# Altium PCB PCB1.PcbDoc
Units mm, origin at the board's own origin, x right, y up, seen from the top; angles counter-clockwise.
Board outline 61.6 x 33.9 mm, 2 copper layers (Top Layer, Bottom Layer); 45 components, 33 nets, 126 pads, 27 vias.
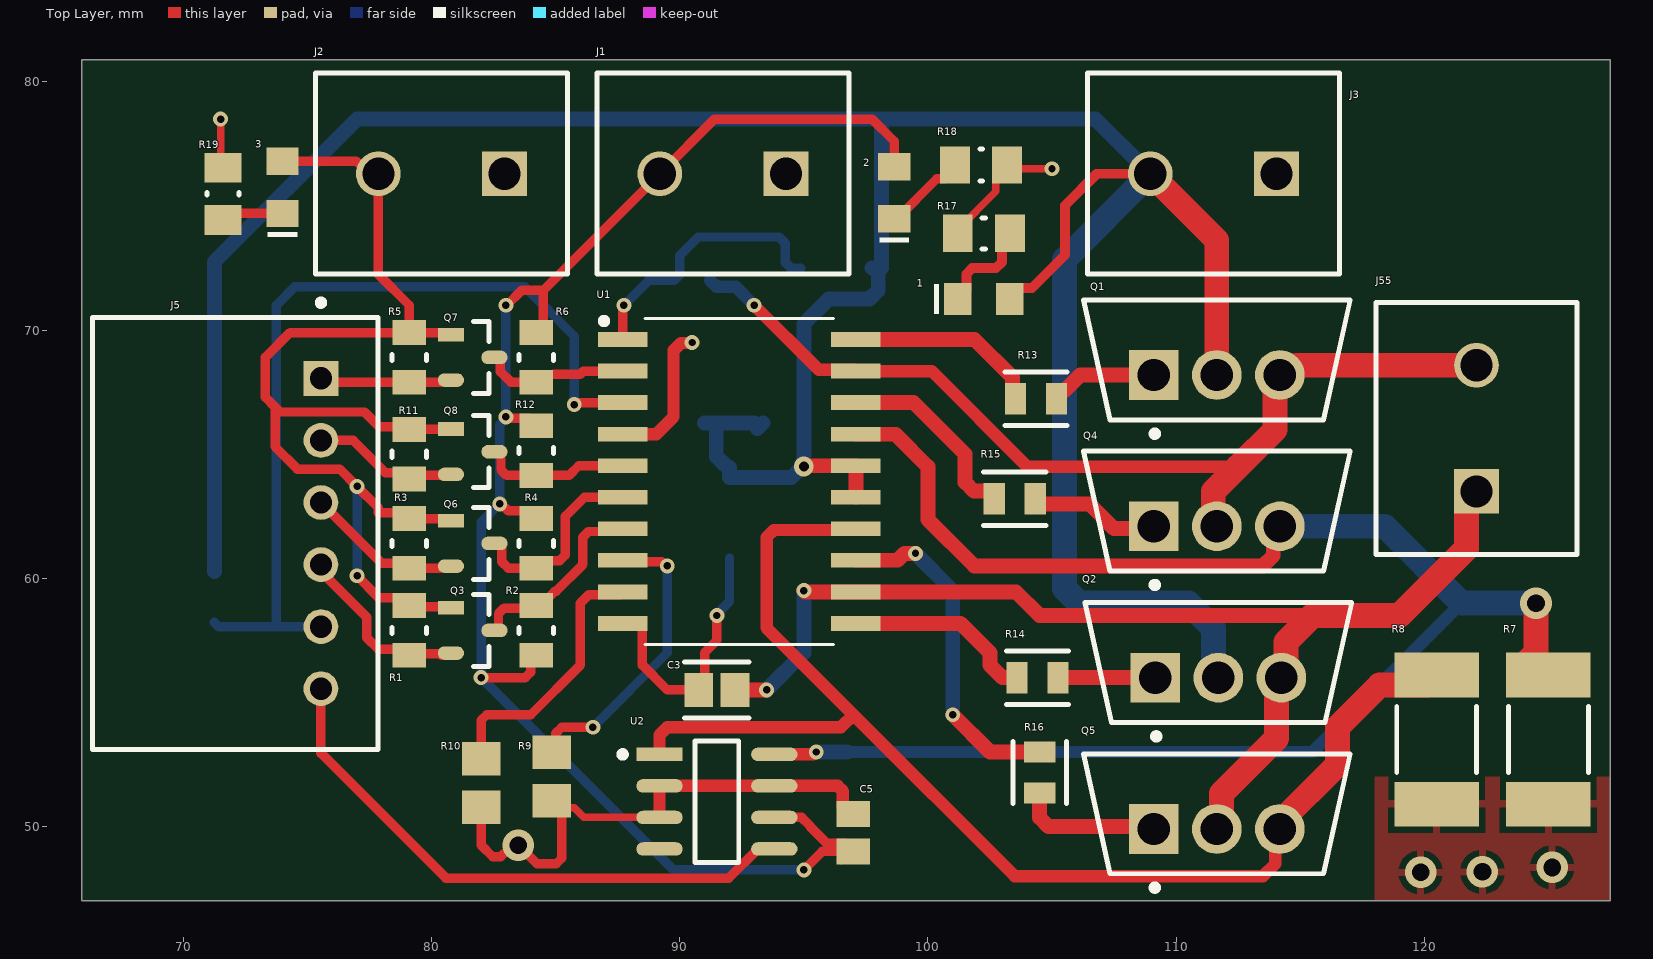
[diagram p0: Top Layer view]
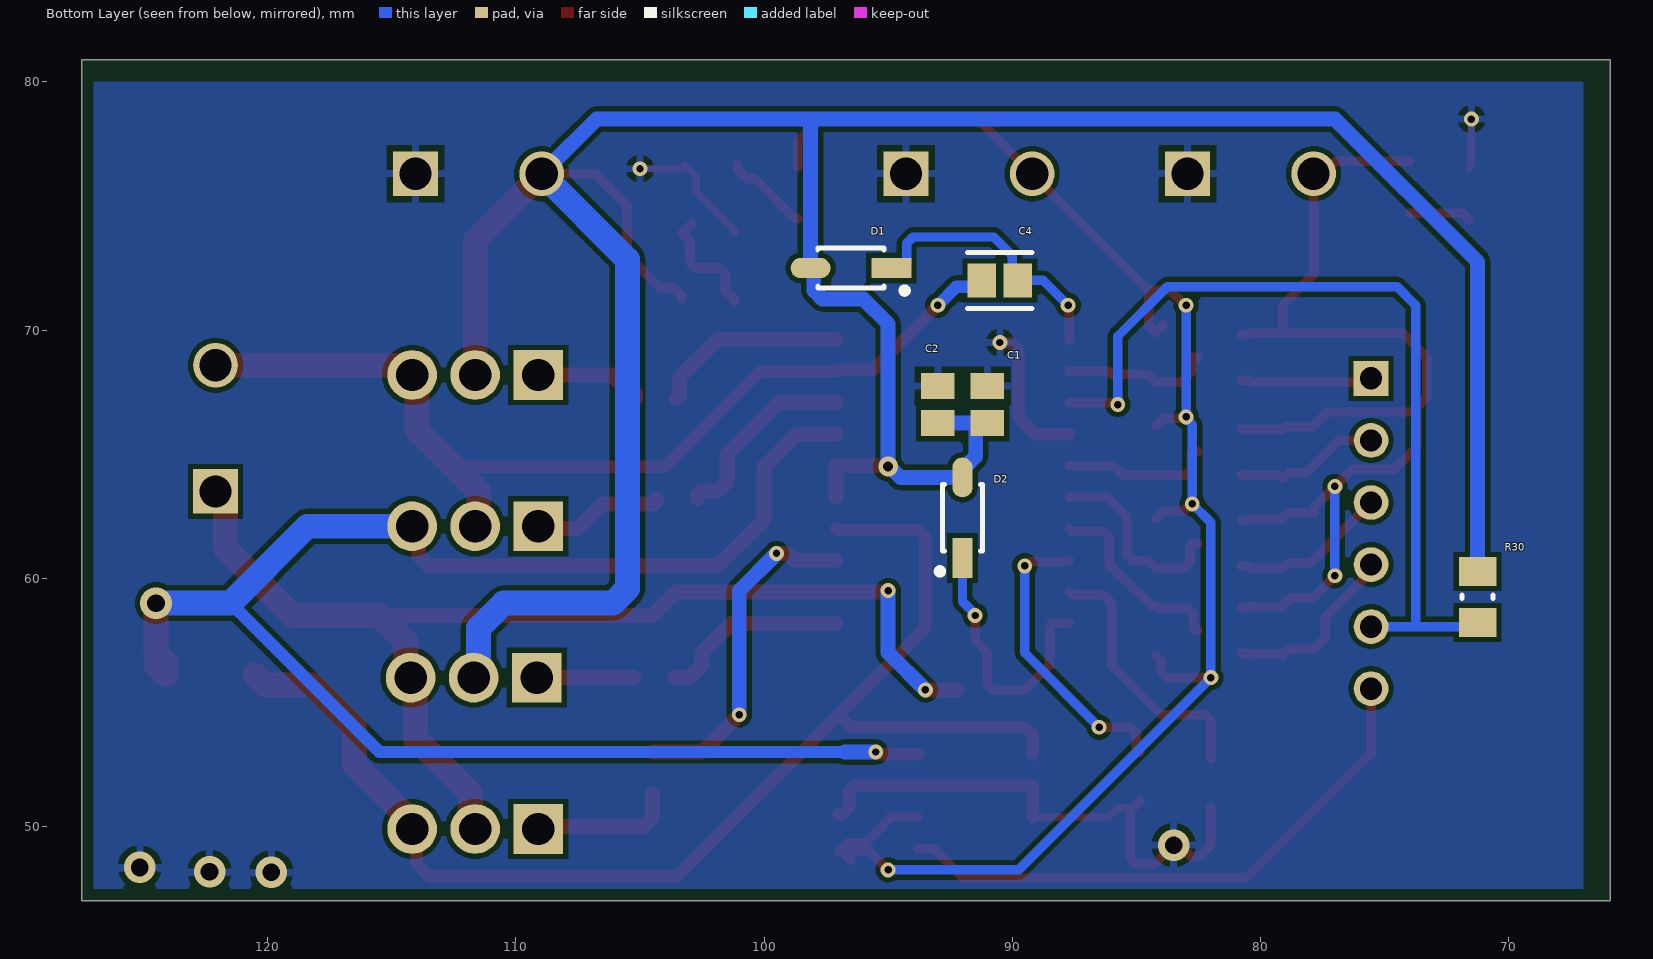
[diagram p1: Bottom Layer view, seen from below]
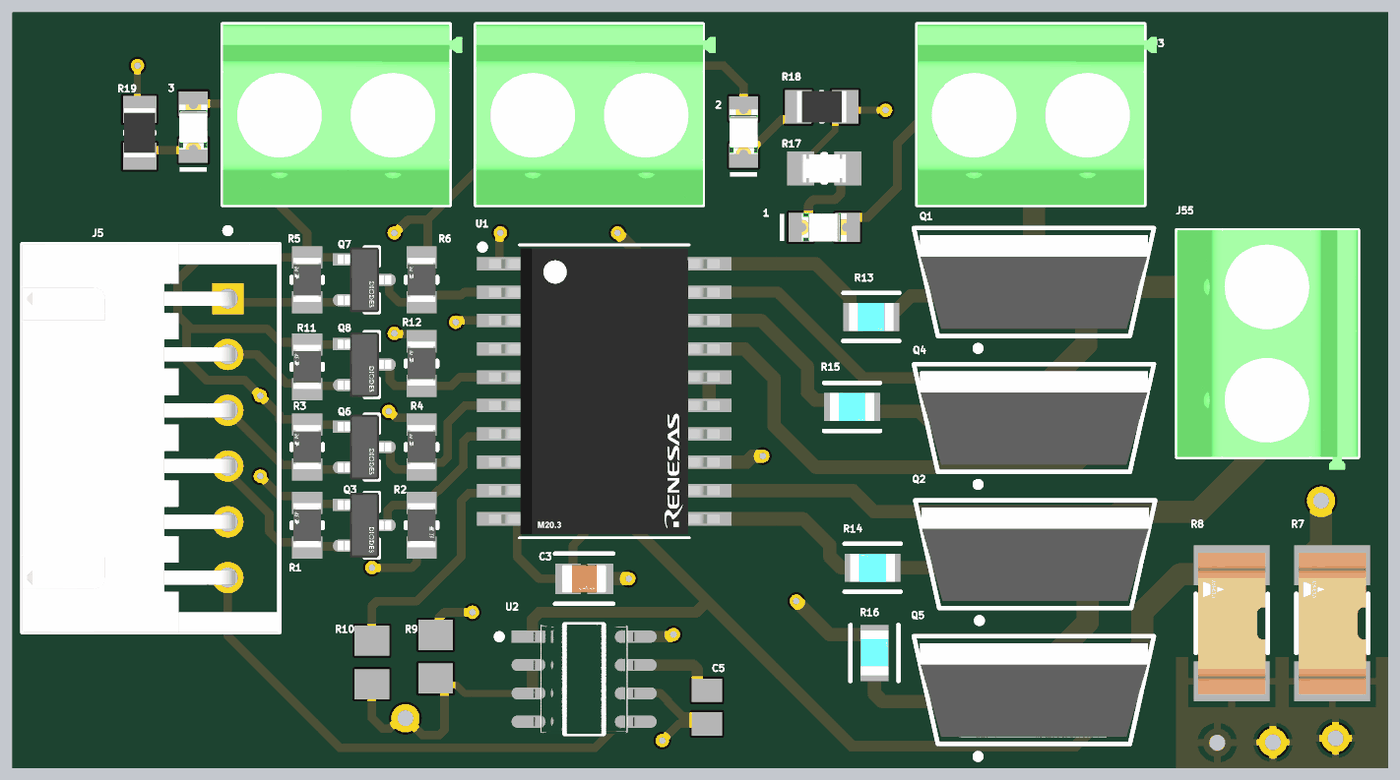
[diagram p2: 3D render of the assembled board from above, using the file's embedded part models]
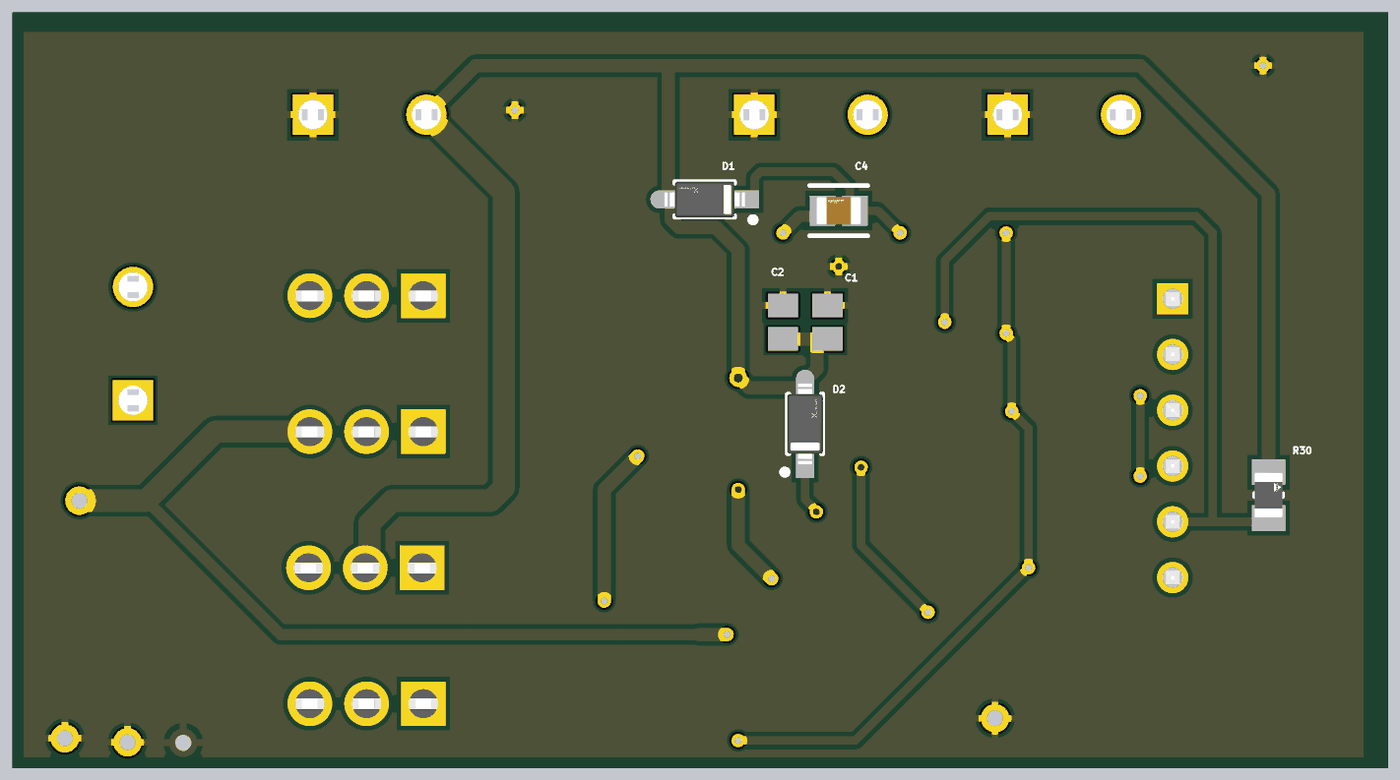
[diagram p3: 3D render of the assembled board from below, using the file's embedded part models]

## Layer stack, top to bottom
Top Solder: solder mask 0.0102, Solder Resist, Dk 3.5
Top Layer: signal copper 0.0356
Dielectric 1: dielectric 0.32, FR-4, Dk 4.8
Bottom Layer: signal copper 0.0356
Bottom Solder: solder mask 0.0102, Solder Resist, Dk 3.5

## Board outline
65.9,47 65.9,80.9 127.5,80.9 127.5,47

## Design rules (kind name [scope] priority, off if disabled: settings)
Clearance [All] p1: gap=0.2 ignorepadtopadclearanceinfootprint=FALSE
MinimumSolderMaskSliver [All] p1: minsoldermaskwidth=0.2
PolygonConnect [All] p1: connectstyle=Relief reliefconductorwidth=0.3 reliefentries=4 polygonreliefangle="90 Angle" airgapwidth=0.254
RoutingVias [All] p1: holewidth=0.3 width=0.7 viastyle="Through Hole" minholewidth=0.25 minwidth=0.3 maxholewidth=0.4 maxwidth=0.9
SolderMaskExpansion [All] p1: expansion=0.102 istentingtop=FALSE
SupplyNets "Schematic Supply Nets_3" [InNet('3V3')] p1: voltage=0.000
SupplyNets "Schematic Supply Nets_2" [InNet('5V')] p2: voltage=0.000
SupplyNets "Schematic Supply Nets_1" [InNet('GND')] p3: voltage=0.000
SupplyNets "Schematic Supply Nets" [InNet('+12')] p4: voltage=0.000
UnRoutedNet [All] p1: checkbadconnections=TRUE
Width [All] p1: maxlimit=1 minlimit=0.2 preferedwidth=0.3 minimp=50.000000 maximp=50.000000 favimp=50.000000
28 further rules are at their usual default settings.

## Components (designator, comment, footprint, x,y, rotation, side; value= is the part's Value field where it differs from the comment)
1 "RED LED" WL-SMCW_0805_150080xx75000 102.25,71.25 r0 top
2 "RED LED" WL-SMCW_0805_150080xx75000 98.644,75.531 r90 top
3 "RED LED" WL-SMCW_0805_150080xx75000 74,75.75 r90 top
C1 "100n" CAPC2013X140X45LL15T25 91,67 r270 bottom
C2 "100nF" CAPC2013X140X45LL15T25 93,67 r270 bottom
C3 "0.033uF" FP-GCG21B-0_3-IPC_C 91.5,55.5 r0 top
C4 "0.033uF" FP-GCG21B-0_3-IPC_C 90.5,72 r0 bottom
C5 "100nF" CAPC2013X140X45LL15T25 97,49.75 r270 top
D1 "BAT46GWJ" FP-SOD123-IPC_A 96.5,72.5 r0 bottom
D2 "BAT46GWJ" FP-SOD123-IPC_A 92.007,62.44 r90 bottom
J1 "1729128" PHOE-1729128-2_V 91.74,76.3 r180 top
J2 "1729128" PHOE-1729128-2_V 80.4,76.3 r180 top
J3 "1729128" PHOE-1729128-2_V 111.502,76.3 r180 top
J5 "S6B-XH-A (LF)(SN)" FP-S6B-XH-A_LF_SN-MFG 72.096,61.804 r90 top
J55 "1729128" PHOE-1729128-2_V 122.1,66.04 r90 top
Q1 "IRF520NPBF" FP-PG-TO220-3-MFG 111.64,68.8 r90 top
Q2 "IRF520NPBF" FP-PG-TO220-3-MFG 111.7,56.604 r90 top
Q3 "BS170FTA" FP-SOT23-IPC_C 81.66,57.9 r0 top
Q4 "IRF520NPBF" FP-PG-TO220-3-MFG 111.64,62.706 r90 top
Q5 "IRF520NPBF" FP-PG-TO220-3-MFG 111.64,50.51 r90 top
Q6 "BS170FTA" FP-SOT23-IPC_C 81.66,61.404 r0 top
Q7 "BS170FTA" FP-SOT23-IPC_C 81.66,68.9 r0 top
Q8 "BS170FTA" FP-SOT23-IPC_C 81.66,65.099 r0 top
R1 "10k" FP-RN732A-MFG 79.1,57.9 r90 top value=10.LKΩ
R2 "10k" FP-RN732A-MFG 84.22,57.9 r270 top value=10.LKΩ
R3 "10k" FP-RN732A-MFG 79.1,61.404 r90 top value=10.LKΩ
R4 "10k" FP-RN732A-MFG 84.22,61.404 r90 top value=10.LKΩ
R5 "10k" FP-RN732A-MFG 79.1,68.9 r90 top value=10.LKΩ
R6 "10k" FP-RN732A-MFG 84.22,68.9 r90 top value=10.LKΩ
R7 "2.3m" FP-WSLF2512-1_02-MFG 125,53.5 r90 top
R8 "2.3m" FP-WSLF2512-1_02-MFG 120.5,53.5 r90 top
R9 "200k" RESC2013X70X40ML20T20 84.854,52.01 r90 top
R10 "200k" RESC2013X70X40ML20T20 82,51.75 r90 top
R11 "10k" FP-RN732A-MFG 79.1,65 r90 top value=10.LKΩ
R12 "10k" FP-RN732A-MFG 84.22,65.146 r90 top value=10.LKΩ
R13 "27" FP-RK73H2A-IPC_C 104.358,67.236 r0 top
R14 "27" FP-RK73H2A-IPC_C 104.418,55.997 r180 top
R15 "27" FP-RK73H2A-IPC_C 103.5,63.203 r0 top
R16 "27" FP-RK73H2A-IPC_C 104.5,52.175 r90 top
R17 "47k" FP-CRCW0805-e3-IPC_A 102.254,73.896 r180 top
R18 "Resistor 10k +/-1% 0805 125 mW" RESC2013X50X35ML15T15 102.142,76.654 r0 top value=10k
R19 "Resistor 10k +/-1% 0805 125 mW" RESC2013X50X35ML15T15 71.596,75.489 r90 top value=10k
R30 "20k" FP-MCU0805-IPC_A 71.25,59.25 r90 bottom
U1 "HIP4081AIBZ" M20_3_MFG 92.4,63.9 r0 top
U2 "INA240A4EDRQ1" FP-D0008A-IPC_C 91.5,51 r0 top

## Footprints (in the part's own frame and the unit in brackets; to place one, negate y for a bottom-side part, rotate by r counter-clockwise, add the part's x,y. Pads: shape width x height; smd on the part's side, far side on the other; paste and mask are expansions set on the pad)
CAPC2013X140X45LL15T25 [mm] "Chip Capacitor, 2-Leads, Body 2.00x1.25mm, IPC High Density"
  rect 1.05x1.35 smd: 1(-0.75,0) 2(0.75,0)
  body extent -1.08,-0.7 1.07,0.7, height 1.4
FP-CRCW0805-e3-IPC_A [mil]
  rect 47.5x59.38 smd paste+0 mask+0: 1(-41.37,0) 2(41.37,0)
  silkscreen extent -3,-25 3,25, body extent -85,-49 85,49, height 10
FP-D0008A-IPC_C [mm]
  rect 1.869x0.542 smd paste+0 mask+0: 1(-2.314,1.905)
  rrect100% 1.869x0.542 smd paste+0 mask+0: 2(-2.314,0.635) 3(-2.314,-0.635) 4(-2.314,-1.905) 5(2.314,-1.905) 6(2.314,-0.635) 7(2.314,0.635) 8(2.314,1.905)
  silkscreen extent -3.92,-2.45 0.88,2.45, body extent -3.35,-2.55 3.35,2.55, height 0.25
FP-GCG21B-0_3-IPC_C [mm]
  rect 1.153x1.356 smd paste+0 mask+0: 1(-0.725,0) 2(0.725,0)
  silkscreen extent -1.3,-1.12 1.3,1.12, body extent -1.4,-0.82 1.4,0.82, height 0.25
FP-MCU0805-IPC_A [mm]
  rect 1.159x1.508 smd paste+0 mask+0: 1(-1.027,0) 2(1.027,0)
  silkscreen extent -0.07,-0.63 0.07,0.63, body extent -1,-0.63 1,0.63, height 0.55
FP-PG-TO220-3-MFG [mm]
  rect 2x2 hole 1.3 paste-2539.97 mask+0: 1(-0.61,2.54)
  round 2 hole 1.3 paste-2539.97 mask+0: 2(-0.61,0) 3(-0.61,-2.54)
  silkscreen extent -3.1,-5.38 2.41,5.38, body extent -2.51,-5.48 2.51,5.48, height 0.25
FP-RK73H2A-IPC_C [mil]
  rect 33.67x49.69 smd paste+0 mask+0: 1(-32.5,0) 2(32.5,0)
  silkscreen extent -49,-42 49,42, body extent -53,-31 53,31, height 10
FP-RN732A-MFG [mm]
  rect 1x1.35 smd paste+0 mask+0: 1(-1,0) 2(1,0)
  silkscreen extent -0.13,-0.7 0.13,0.7, body extent -1.6,-0.8 1.6,0.8, height 0.25
FP-S6B-XH-A_LF_SN-MFG [mm]
  rect 1.4x1.4 hole 0.9 paste-2539.97 mask+0: 1(6.25,-3.45)
  round 1.4 hole 0.9 paste-2539.97 mask+0: 2(3.75,-3.45) 3(1.25,-3.45) 4(-1.25,-3.45) 5(-3.75,-3.45) 6(-6.25,-3.45)
  silkscreen extent -8.7,-5.75 9.42,5.75, body extent -8.7,-5.75 8.7,5.75, height 6.1
FP-SOD123-IPC_A [mm]
  rect 1.607x0.816 smd paste+0 mask+0: 1(-1.626,0)
  rrect100% 1.607x0.816 smd paste+0 mask+0: 2(1.626,0)
  silkscreen extent -2.29,-0.8 1.34,1.03, body extent -1.8,-0.8 1.8,0.8, height 1.3
FP-SOT23-IPC_C [mm]
  rect 1.059x0.547 smd paste+0 mask+0: 1(-0.877,0.915)
  rrect100% 1.059x0.547 smd paste+0 mask+0: 2(-0.877,-0.915) 3(0.877,0)
  silkscreen extent 0.03,-1.45 0.65,1.45, body extent -1.51,-1.55 1.51,1.55, height 0.25
FP-WSLF2512-1_02-MFG [mm]
  rect 1.8x3.4 smd paste+0 mask+0: 1(-2.6,0) 2(2.6,0)
  silkscreen extent -1.33,-1.61 1.33,1.61, body extent -3.6,-1.8 3.6,1.8, height 0.25
M20_3_MFG [mm] "Recommended Land Pattern"
  rect 2x0.6 smd paste+0 mask+0: 1(-4.7,5.715) 2(-4.7,4.445) 3(-4.7,3.175) 4(-4.7,1.905) 5(-4.7,0.635) 6(-4.7,-0.635) 7(-4.7,-1.905) 8(-4.7,-3.175) 9(-4.7,-4.445) 10(-4.7,-5.715) 11(4.7,-5.715) 12(4.7,-4.445) 13(4.7,-3.175) 14(4.7,-1.905) 15(4.7,-0.635) 16(4.7,0.635) 17(4.7,1.905) 18(4.7,3.175) 19(4.7,4.445) 20(4.7,5.715)
  silkscreen extent -5.57,-6.56 3.8,6.59, body extent -5.16,-6.4 5.16,6.4, height 2.65
PHOE-1729128-2_V [mm] "Receptacle, 2-Leads, Body 8.1x10.16mm, Pitch 5.08mm"
  rect 1.8x1.8 hole 1.3: 1(-2.54,0)
  round 1.8 hole 1.3: 2(2.54,0)
  silkscreen extent -5.08,-4.05 5.08,4.05, body extent -5.65,-4.05 5.08,4.05, height 10.01
RESC2013X50X35ML15T15 [mm] "Chip Resistor, 2-Leads, Body 2.2x1.4mm, IPC Low Density"
  rect 1.2x1.5 smd: 1(-1.05,0) 2(1.05,0)
  silkscreen extent -0.05,-0.65 0.05,0.65, body extent -1.1,-0.7 1.1,0.7, height 0.5
RESC2013X70X40ML20T20 [mm] "Chip Resistor, 2-Leads, Body 2.00x1.25mm, IPC Low Density"
  rect 1.35x1.55 smd: 1(-0.975,0) 2(0.975,0)
  body extent -1.1,-0.72 1.1,0.72, height 0.7
WL-SMCW_0805_150080xx75000 [mm] "SMD Mono-color Chip LED, body 2.0x1.25mm"
  rect 1.1x1.3 smd: 1(-1.05,0) 2(1.05,0)
  silkscreen extent -2,-0.6 -1.8,0.6, body extent -1,-0.63 1,0.62, height 0.7

## Part data
1 2 3: library part CMP-1426-00010-3, Case Code (Imperial)=0805, Case Code (Metric)=2012, Color=Red, Forward Current=100mA, Forward Voltage=1.9V, Max Junction Temperature (Tj)=95°C, Max Operating Temperature=85°C, Max Reverse Voltage (DC)=5V, Min Operating Temperature=-40°C, Power Dissipation=72mW, Test Current=20mA, Case/Package=0805, Dominant Wavelength=630nm, Height=700µm, Length=2mm, Lens Style="Clear, Rectangular", Luminous Intensity=60mcd, Mount="Surface Mount", NexarPartId=29717782, Packaging="Tape and Reel", Peak Wavelength=645nm, REACH SVHC=Unknown, Reverse Voltage=5V, RoHS=Compliant, Viewing Angle=140°, Wavelength=630nm, Width=1.25mm
C1 C2 C5: library part CMP-2007-03344-1, Manufacturer=Murata, Part Number=GCM21BR71E104KA37L
C3 C4: library part CMP-06035-035210-1, "AgPd Termination Conductive Glue Mounting Chip Multilayer Ceramic Capacitors for Automotive 0805 Package X8L +15/-40% 50V 33000pF 20%"
D1 D2: library part CMP-14398-000021-1, "DIODE SCHOTTKY 100V 250MA SOD123"
J1 J2 J3 J55: library part CMP-2000-05815-1, "PCB Terminal Block, 13.5 A, 400 V, 2-Pin THD, RoHS, Bulk", Current Rating=13500mA, Manufacturer="Phoenix Contact", Package Description="2-Pin Through Hole Device, Body 8.1 x 10.16 mm, Pitch 5.08 mm", Package Reference=1729128-2, Package Version=03/2015, Voltage Rating=400V, Datasheet URL=https://datasheet.ciiva.com/16046/1729128-16046181.pdf, Datasheet Version=12/2013, Manufacturer URL=http://www.phoenixcontact.com/, Mounting Technology=ThroughHole, No. of Positions=2, No. of Rows=1, Orientation=Horizontal, Package URL=https://www.phoenixcontact.com/online/portal/pi/pxc/product_detail_page/!ut/p/b1/3VdJjqNKFDxLH8AFycySyWY2ozFsEPOMMQaDOX1XedGL_1Vdm5YXJleknhSKeBkvI6EA8ncAo3AYoDhBQGco6KN7VURTdemj9us_IEKEZo_YHiPAEWEFmDGOHMORkqKYCORBZxgL7ZoaZYcbFFUZ3fqxSY6GOuxydWUuHqz1ynmMFygu583Bob0Ewr6Sd_l-5m-kAueHiB0jpRwZwe58wwtkpxtMYd_LmGcDRU02dRNEyWt6Y2ti5pSyJ_reIkzIulrqApdnbT11V5jnCKbYNCvhEM1MCpPByat_X379-iThf08CI5GfOPqfBeS3BRoBOdD55AKVv0iLwCMq-2BrzXWSGRH7pUGD9uwXQjiph3xL0DKQwdGa0JImiIOmBNOestqgwTHSSs2oOep-78apyXQBvNi8ZLaFjvjWvcaUEBu0MC6Wbe-d6mB0FAebo2lUWinqYaZs5DAYzV0RP9yitUjnGJ0iI9xhZkT42OCQNUJJhkgWINNQLP2JFP6OpMg3JCVg70jqHT0lvKOnhHf0lPuOnnLf0VPuWx6_dxwUIvwk5WMkT0kLL1mh61l2yZVSzG3pYV_bqo-mj6uMKwKwdnnW8Jh5RTOJzMOA5c-eJDaZQw4mTMPH02PvS_ZAqNVjVTo2WyYLkwH_KU1mmmG5kjRhDqPXLwwVHvVOjCM60-fpXvTDfMGW1PVFVS1r4e4yVDk4ZdNbkUHvqPqQSeian4UD39fNKmachqdJ1NJbyk8rXT9mXTvPk3oE5meulKGgiruPJek-4I9hTT6G8ZLOyRSm2RRVbThERQad5OS28hdt4YW4vG0stgYYzsWsK4_7y6DZMjJSCqri1kyiZR5vD7pwIrNR7QwPHTcLTI5qT7eRlpHrdGiupYlqQDJ7zy_CND8fWWBoLRXxk1RVcXiBQwbTD4Xi7KL-FuO94t9xaqweXzH, Packing=Bulk, PartNumber=1729128, Pitch=5.08mm, RoHS=TRUE
J5: library part CMP-17439-000165-2, "CONN HEADER R/A 6POS 2.5MM", Color=Natural, Contact Resistance=20mR, Current Rating=3A, Flammability Rating="UL94 V-0", Housing Color=White, Insulation Resistance=1GR, Max Operating Temperature=85°C, Max Voltage Rating (AC)=250V, Min Operating Temperature=-25°C, Package Quantity=500, Connector Type=Header, Contact Finish - Mating=TIN, Contact Material=Brass, Contact Plating=Tin, Contact Shape=Square, Contact Type="Male Pin", Depth=11.5mm, Fastening Type=Detent, Gender=Male, Housing Material=Polyamide, Insulation Color=Natural, Insulation Material=Nylon, Lead Free="Lead Free", Lead Pitch=2.5mm, Length=17.4mm, Max Current Rating=3A, Mount="Through Hole", Number Of Contacts=6, Number of Positions=6, Number of Rows=1, Orientation="Right Angle", Packaging=Bulk, Pitch=2.5mm, REACH SVHC="No SVHC", Series=XH, Termination=Solder, Voltage Rating=250V, Voltage Rating (AC)=250V, Wire/Cable Gauge=22AWG
Q1 Q2 Q4 Q5: library part CMP-32901-000276-1, "MOSFET N-CH 100V 9.7A TO-220AB", Case/Package=TO-220, Continuous Drain Current (ID)=9.7A, Drain to Source Breakdown Voltage=100V, Drain to Source Resistance=200mR, Gate to Source Voltage (Vgs)=20V, Input Capacitance=330pF, Max Operating Temperature=175°C, Max Power Dissipation=48W, Min Operating Temperature=-55°C, Threshold Voltage=4V, Contact Plating=Tin, Drain to Source Voltage (Vdss)=100V, Element Configuration=Single, Halogen Free="Halogen Free", Height=0.6inch, Lead Free="Lead Free", Length=0.414inch, Max Dual Supply Voltage=100V, Mount="Through Hole", Number of Pins=3, Packaging=Rail/Tube, Power Dissipation=48W, Rds On Max=200mR, REACH SVHC="No SVHC", Rise Time=23ns, RoHS Compliant=Yes, Turn-Off Delay Time=32ns, Turn-On Delay Time=4.5ns, Width=0.185inch
Q3 Q6 Q7 Q8: library part CMP-12801-000064-2, "MOSFET N-CH 60V .15MA SOT23-3", Case/Package=SOT-23, Continuous Drain Current (ID)=150mA, Drain to Source Breakdown Voltage=60V, Drain to Source Resistance=5R, Gate to Source Voltage (Vgs)=20V, Input Capacitance=60pF, Max Operating Temperature=150°C, Max Power Dissipation=330mW, Min Operating Temperature=-55°C, Package Quantity=3000, Threshold Voltage=3V, Contact Plating=Tin, Current Rating=150mA, Drain to Source Voltage (Vdss)=60V, Dual Supply Voltage=60V, Element Configuration=Single, Height=1mm, Lead Free="Lead Free", Length=3.05mm, Mount="Surface Mount", Nominal Vgs=3V, Number of Channels=1, Number of Elements=1, Number of Pins=3, On-State Resistance=5R, Packaging="Tape and Reel", Power Dissipation=330mW, Rds On Max=5R, REACH SVHC="No SVHC", Termination=SMD/SMT, Turn-Off Delay Time=10ns, Turn-On Delay Time=10ns, Voltage Rating (DC)=60V, Weight=0.000282oz, Width=1.4mm
R1 R2 R3 R4 R5 R6 R11 R12: library part CMP-03211-000999-1, "SMD Chip Resistor, Thin Film, 10.LKΩ, 100 V, 0805 [2012 Metric], 100 mW, 0.1%, RN73 Series", Manufacturer="TE Connectivity", Manufacturer Part Number=RN73C2A10KLTDF, Package=RN732A, Power Rating=0.1W, Resistance=10.LKΩ, Temperature="-55°C to 155°C", Temperature Coefficient=10ppm/°C, Temperature Range High=155°C, Temperature Range Low=-55°C, Tolerance=42, Voltage Rating=100V, Automotive=No, Category=Res, ComponentLink2Description=Datasheet, ComponentLink2URL=https://www.te.com/commerce/DocumentDelivery/DDEController?Action=showdoc&DocId=Data+Sheet%7F1773270%7FP%7Fpdf%7FEnglish%7FENG_DS_1773270_P.pdf%7F1676162-2, Composition="Thin Film", Device Class L1="Passive Components", Device Class L2=Resistors, Device Class L3="Chip SMD Resistors", Height=0.65mm, Ipc Land Pattern Name=RESC200125X55, Lead Free=Yes, Octopart=https://octopart.com/rn73c2a10kltdf-te+connectivity-22738657, octopart_url=https://octopart.com/rn73c2a10kltdf-te+connectivity-22738657, Packaging="1000 Reel", RoHS=TRUE, Series=RN73
R7 R8: library part CMP-00030-75451314-1, "WSLF2512L3000FEA Res Metal Strip 2512 0.0003 Ohm 1% 6W ±200ppm/C Sulfur Resistant Pad SMD Automotive T/R", Case Code (Imperial)=2512, Case Code (Metric)=6432, Max Operating Temperature=170°C, Max Power Dissipation=6W, Min Operating Temperature=-65°C, Power Rating=10W, Resistance=300µΩ, Temperature Coefficient=200ppm/°C, Tolerance=1%, Case/Package=2512, Composition="Metal Element", Features="Moisture Resistant", Height=609.6µm, Lead Free="Lead Free", Length=6.35mm, NexarPartId=75451314, Number of Terminations=2, Packaging="Cut Tape", RoHS=Compliant, Schedule B="8533210045, 8533210045", Width=3.175mm
R9 R10: library part CMP-2001-00372-1, Manufacturer=Panasonic, Part Number=ERJ-6GEYJ204V
R13 R14 R15 R16: library part CMP-04015-095776-1, "27Ω ±1% 0.25W Chip Resistor 0805 Thick Film AEC-Q200 Qualified", Case Code (Imperial)=0805, Case Code (Metric)=2012, Max Operating Temperature=155°C, Min Operating Temperature=-55°C, Package Quantity=5000, Power Rating=125mW, Resistance=27R, Temperature Coefficient=100ppm/°C, Tolerance=1%, Voltage Rating=150V, Case/Package=0805, Height=0.5mm, Length=2mm, Packaging="Tape and Reel", RoHS Compliant=No, Series=RK73H, Termination=SMD/SMT, Width=1.25mm
R17: library part CMP-009-00178-1, "Res Thick Film 0805 47K Ohm 1% 1/8W ±100ppm/°C Molded SMD SMD Paper T/R", Case Code (Imperial)=0805, Case Code (Metric)=2012, Max Operating Temperature=155°C, Max Power Dissipation=125mW, Min Operating Temperature=-55°C, Package Quantity=10, Resistance=47kR, Resistance Tolerance=1%, Resistor Type="Thick Film", Temperature Coefficient=100ppm/°C, Voltage Rating=150V, Case/Package=0805, Construction=Rectangular, Contact Plating=Tin, Depth=1.25mm, Features="Automotive AEC-Q200", Height=0.45mm, Lead Free="Lead Free", Length=2mm, Military Standard=Not, Number of Terminations=2, Packaging="Tape and Reel", Power Rating=125mW, Radiation Hardening=No, RoHS Compliant=Yes, Series=CRCW, Technology="THICK FILM", Termination=SMD/SMT, Tolerance=1%, Voltage Rating (DC)=150V, Weight=0.000194oz, Width=0.049inch, Working Voltage=150V
R18 R19: library part CMP-009-00018-5, "Chip Resistor, 10 KOhm, +/- 1%, 125 mW, -55 to 155 degC, 0805 (2012 Metric)", Case/Package=0805, Max Operating Temperature=155°C, Min Operating Temperature=-55°C, Power=125mW, Tolerance=1%, Voltage Rating=150V, Mounting Technology=SM, Pins=2, RoHS Compliant=True
R30: library part CMP-02407-004084-1, "RES 1.05K OHM 0.5% 1/5W 0805", Case Code (Imperial)=0805, Case Code (Metric)=2012, Max Operating Temperature=175°C, Max Power Dissipation=400mW, Min Operating Temperature=-55°C, Resistance=20kR, Temperature Coefficient=25ppm/°C, Tolerance=0.5%, Case/Package=0805, Composition="Thin Film", Features="Automotive AEC-Q200", Number of Terminations=2, Packaging="Cut Tape"
U1: library part CMP-00572-88252432-3, "Driver 2.5A 4-OUT Hi/Lo Side Full Brdg/Half Brdg Inv/Non-Inv Automotive 20-Pin SOIC W Tube", Ambient Temperature Range High=85°C, Case/Package=SOIC, Manufacturer Lifecycle Status=ACTIVE, Max Junction Temperature (Tj)=125°C, Max Output Current=2.5A, Max Power Dissipation=440mW, Max Supply Current=15.5mA, Max Supply Voltage=15V, Min Operating Temperature=-40°C, Min Supply Voltage=9.5V, Output Voltage=80V, Switching Frequency=1MHz, ComponentLink1Description="Manufacturer's Website", ComponentLink1URL=http://www.renesas.com, ComponentLink2Description="Datasheet URL", ComponentLink2URL=https://octopart.com/cad-content/api/get-model-datasheet/15189/88252432, ComponentLink3Description="Manufacturer's Package Drawing", ComponentLink3URL=https://www.renesas.com/en/document/psc/package-drawing-soicw-20pin-m203?r=571616, Export Control Classification Number (ECCN) Code=EAR99, Fall Time=10ns, Height=0m, HelpURL=https://octopart.com/cad-content/api/get-model-datasheet/15189/88252432, Lead Free="Lead Free", Length=12.9mm, Lifecycle Status=Production, Max Operating Temperature=85°C, Mount="Surface Mount", Number of Channels=4, Number of Drivers=4, Number Of Outputs=4, Number of Pins=20, Output Current=2.5A, Overload Protection="Under Voltage", Packaging=Bulk, Pitch=1.3mm, Power Dissipation=440mW, Propagation Delay=30ns, RAM Size=32kB, REACH SVHC=No, Rise Time=10ns, RoHS=Compliant, Width=7.5mm
U2: library part CMP-04895-000250-1, "IC CURR SENSE 1 CIRCUIT 8SOIC", Max Operating Temperature=150°C, Min Operating Temperature=-40°C, RoHS Compliant=Yes

## Via types
v1: diameter 0.6, hole 0.3, Top Layer to Bottom Layer, 21 vias
v2: diameter 1.27, hole 0.711, Top Layer to Bottom Layer, 4 vias
v3: diameter 0.8, hole 0.4, Top Layer to Bottom Layer, 1 vias
v4: diameter 1.27, hole 0.711, Top Layer to Bottom Layer, tented top, 1 vias

## Nets (pads, with @x,y where several pads share a name; then routed paths per layer and width w, separated by ;. In a path a pad name is that pad's centre, name@x,y a point inside that pad or via, vN(x,y) a via of type N, cw(c..) or ccw(c..) an arc to the next point about the centre after c; other vN are vias at no path point)
3V3: 3.2 J2.2 Q3.1 Q6.1 Q7.1 Q8.1 R1.2 R3.2 R5.2 R11.2 | length 46.9
  Top Layer w0.381: 3.2 76.976,76.8 77.476,76.3 J2.2 77.86,72.24 79.1,71 R5.2 ; v1(77,60.1) 77.891,59.209 78.791,59.209 R1.2 79.143,58.857 Q3.1@80.485,58.857 ; Q3.1@80.442,58.9 Q3.1@80.485,58.857 ; Q6.1 80.527,62.319 80.442,62.404 R3.2 78.858,62.646 77.854,62.646 77.854,62.846 v1(77,63.7) 76.3,64.4 74.6,64.4 73.7,65.3 73.7,66.9 ; Q8.1 80.776,66.007 79.107,66.007 R11.2 79,66.1 77.9,66.1 77.5,66.5 77.3,66.7 73.9,66.7 73.7,66.9 ; Q7.1 80.527,69.815 80.443,69.9 R5.2 ; 73.7,66.9 73.3,67.3 73.3,68.9 74.3,69.9 R5.2 ; Q3.1@80.485,58.857 80.741,58.857 Q3.1 80.527,58.815 Q3.1@80.485,58.857
  Bottom Layer w0.381: v1(77,60.1) v1(77,63.7)
3V3AHI: J5.4 Q3.2 R1.1 | length 7.6
  Top Layer w0.381: J5.4@75.546,60.278 77.4,58.424 77.4,57.6 77.854,57.146 78.853,57.146 R1.1 79.153,56.953 Q3.2@80.451,56.953 ; Q3.2@80.398,56.9 Q3.2@80.451,56.953 ; Q3.2@80.451,56.953 80.483,56.985 Q3.2 80.752,56.953 Q3.2@80.451,56.953
3V3ALI: J5.3 Q6.2 R3.1 | length 6.4
  Top Layer w0.381: J5.3 78,60.6 78.904,60.6 R3.1 80.398,60.404 80.483,60.489 Q6.2
3V3BHI: J5.1 Q7.2 R5.1 | length 5.3
  Top Layer w0.381: J5.1 75.7,67.9 R5.1 80.397,67.9 80.483,67.985 Q7.2
3V3BLI: J5.2 Q8.2 R11.1 | length 6
  Top Layer w0.381: J5.2 76.846,65.554 78.139,64.261 78.839,64.261 R11.1 79.253,64.153 80.752,64.153 Q8.2
5V: 2.2 C5.2 J1.2 R2.2 R4.2 R6.2 R12.2 U2.6 | length 66.5
  Top Layer w0.381: v1(82,56) 83.777,56 84,56.223 84,56.68 R2.2 ; v1(82.75,63) 82.809,63 83.096,62.714 83.911,62.714 R4.2 ; v1(83,66.5) 83.059,66.5 83.104,66.456 83.911,66.456 R12.2 ; v1(83,71) 83.032,71 83.632,71.6 84.5,71.6 ; R6.2@83.911,70.209 R6.2 84.5,70.18 84.5,71.6 ; U2.6 94.912,50.365 95.25,50.027 95.25,50 95.915,49.335 96.665,49.335 C5.2 C5.2@96.85,49 ; v1(95,48.25) 95.75,49 C5.2@96.85,49 ; C5.2@96.515,48.666 C5.2@96.85,49 ; 2.2 98.644,77.606 97.75,78.5 91.4,78.5 J1.2 84.5,71.6
  Bottom Layer w0.381: v1(83,71) 83,66.441 82.75,66.191 v1(82.75,63) 82,62.25 v1(82,56) 89.75,48.25 v1(95,48.25)
+12: 1.2 C1.2 C2.2 D1.2 D2.2 J3.2 Q1.2 Q2.2 R30.2 U1.15 U1.16 | length 126.6
  Top Layer w0.4: 1.2 103.3,71.35 103.65,71.7 104.2,71.7 105.525,73.025 105.525,75.025 106.8,76.3 J3.2
  Top Layer w0.6: v3(95,64.5) 95.035,64.535 U1.16 U1.15
  Top Layer w1: J3.2 111.64,73.622 Q1.2
  Bottom Layer w0.6: R30.2 71.25,72.75 77,78.5 98.25,78.5 ; C1.2 C1.2@91.472,66.25 ; D2.2@92.007,64.461 D2.2@92.007,64.403 ; C2.2 C1.2@91.472,66.25 ; C2.2@93.125,66.025 C2.2@93.35,66.25 ; D1.2@97.75,72.5 D1.2@98.1,72.5 ; J3.2 107.762,77.5 107.75,77.5 106.75,78.5 98.25,78.5 ; C1.2@91.472,66.25 91.472,64.913 91.823,64.561 91.849,64.561 D2.2@92.007,64.403 ; D2.2@92.007,64.403 D2.2 94.512,64.066 94.946,64.5 v3(95,64.5) 95,70.25 96,71.25 97.649,71.25 98,71.601 98,72.4 D1.2@98.1,72.5 ; D1.2@98.1,72.5 D1.2 98.126,78.376 98.25,78.5
  Bottom Layer w1: J3.2 105.5,72.838 105.5,59.586 106.086,59 110.5,59 111.509,57.991 111.509,56.185 Q2.2
AHI: Q3.3 R2.1 U1.7 | length 7.9
  Top Layer w0.381: Q3.3 82.623,57.9 82.7,57.977 82.7,58.577 82.923,58.8 84.12,58.8 R2.1 84.395,58.9 84.974,59.479 85.022,59.479 86.1,60.557 86.1,61.662 86.323,61.885 87.591,61.885 U1.7
AHO: R14.2 U1.11 | length 7.7
  Top Layer w0.6: U1.11 101.315,58.185 102.5,57 102.5,56.5 103,56 103.589,56 R14.2
AHS: C3.2 J55.1 Q2.3 Q5.2 U1.12 | length 46.8
  Top Layer w0.6: C3.2 v1(93.5,55.5) ; v1(95,59.5) 95.045,59.455 U1.12 103.545,59.455 104.5,58.5 115.5,58.5
  Top Layer w1: Q5.2 111.831,50.091 111.831,51.331 114.049,53.549 114.049,55.803 Q2.3 114.431,56.185 114.431,57.431 115.5,58.5 119,58.5 121.7,61.2 121.7,63.1 J55.1
  Bottom Layer w0.6: v1(93.5,55.5) 95,57 v1(95,59.5)
ALI: Q6.3 R4.1 U1.6 | length 8.1
  Top Layer w0.381: Q6.3 82.748,61.404 82.824,61.327 82.824,60.676 83.096,60.404 R4.1 84.53,60.714 85.169,60.714 85.392,60.937 85.392,62.492 86.165,63.265 U1.6
ALO: R16.2 U1.13 | length 13.8
  Top Layer w0.6: U1.13 98.775,60.725 99.05,61 v1(99.5,61) ; v1(101,54.5) 102.5,53 R16.2
  Bottom Layer w0.6: v1(99.5,61) 101,59.5 v1(101,54.5)
ALS: Q5.3 R8.2 U1.14 U2.1 | length 52.6
  Top Layer w0.5: U2.1 89.186,53.686 89.5,54 96.5,54 97,54.5 ; U1.14 97.05,61.945 93.793,61.945 93.5,61.652 93.5,58 97,54.5 ; Q5.3 114,49.72 114,48.5 113.5,48 103.5,48 97,54.5
  Top Layer w1: Q5.3 114.18,50.171 116.5,52.491 116.5,54 118.2,55.7 120.1,55.7 R8.2
BHI: Q7.3 R6.1 U1.2 | length 6.1
  Top Layer w0.381: Q7.3 82.7,68.9 82.777,68.823 82.777,68.323 83.197,67.903 84.217,67.903 R6.1 84.53,68.209 84.921,68.209 84.928,68.217 85.984,68.217 86.112,68.345 U1.2
BHO: R13.1 U1.20 | length 7.8
  Top Layer w0.6: U1.20 101.885,69.615 103.405,68.095 103.405,67.364 R13.1
BHS: C4.2 J55.2 Q1.3 Q4.2 U1.19 | length 39.7
  Top Layer w0.5: v1(93,71) 95.605,68.395 97.05,68.395 U1.19 100.155,68.345 104,64.5 112.5,64.5
  Top Layer w1: Q4.2 111.5,62.236 111.5,63.5 112.5,64.5 113.989,65.989 113.989,67.999 Q1.3 114.451,68.19 114.841,68.58 J55.2
  Bottom Layer w0.5: C4.2 91.475,71.75 92.25,71.75 v1(93,71)
BLI: Q8.3 R12.1 U1.5 | length 6.1
  Top Layer w0.381: Q8.3 82.723,65.099 82.8,65.023 82.8,64.369 83.023,64.146 R12.1 85.546,64.146 85.935,64.535 U1.5
BLO: R15.1 U1.18 | length 7.9
  Top Layer w0.6: U1.18 99.425,67.075 101.5,65 101.5,63.863 101.851,63.512 102.547,63.512 102.675,63.384 R15.1
BLS: Q4.3 R7.2 U1.17 U2.8 | length 66.7
  Top Layer w0.5: U2.8 95.378,52.905 95.473,53 v1(95.5,53)
  Top Layer w0.6: U1.17 98.695,65.805 100,64.5 100,62.369 101.869,60.5 113.5,60.5 113.912,60.912 113.912,61.828 Q4.3
  Top Layer w1: R7.2@124.1,56.1 R7.2@124.5,56.5 ; R7.2@124.1,56.6 124.5,57 v2(124.5,59)
  Bottom Layer w0.5: 96.75,53 115.5,53 121.5,59
  Bottom Layer w0.6: v1(95.5,53) 96.75,53
  Bottom Layer w1: Q4.3 118.404,62.096 121.5,59 v2(124.5,59)
DIS: J5.5 R30.1 U1.3 | length 35.2
  Top Layer w0.381: v1(85.75,67) 85.809,67 85.884,67.075 U1.3
  Bottom Layer w0.381: R30.1 71.42,58.054 73.75,58.054 ; J5.5 73.75,58.054 ; v1(85.75,67) 85.75,69.75 83.75,71.75 74.5,71.75 73.75,71 73.75,58.054
GND: C1.1 C2.1 C5.1 J1.1 J2.1 J3.1 R7.1 R8.1 R9.1 R10.1 R17.2 R18.2 R19.2 U1.4 U2.2 U2.3 U2.7 | length 35.4
  Top Layer w0.3: v1(71.5,78.5) 71.5,76.635 R19.2 ; R9.1@85.25,50.75 85.75,50.75 86.135,50.365 U2.3 ; R17.2 101.203,74.047 102.742,75.586 102.742,76.204 R18.2 103.346,76.5 v1(105,76.5)
  Top Layer w0.381: R10.1 82,49.25 82.467,48.783 82.783,48.783 82.903,48.903 82.912,48.903 v2@83.43,49.42 ; v2(83.5,49.25) 84.25,48.5 85.027,48.5 85.25,48.723 85.25,50.639 85.009,50.88 R9.1
  Top Layer w0.5: U1.4 87.703,65.808 89.058,65.808 89.75,66.5 89.75,69.179 90.052,69.481 90.481,69.481 v1(90.5,69.5) ; U2.3 U2.2 U2.7 96.365,51.635 96.575,51.425 96.575,50.775 96.85,50.5 C5.1
  other v2: 122.343,48.172 125.15,48.35
  other v4: 119.85,48.15
Net1_1: 1.1 R17.1 | length 4.8
  Top Layer w0.4: 1.1@101.2,71.15 1.1 101.55,71.6 101.55,72.266 101.784,72.5 102.75,72.5 102.984,72.734 102.984,73.575 R17.1 R17.1@102.902,74.299
Net2_1: 2.1 R18.1 | length 3.4
  Top Layer w0.381: 2.1 98.744,74.481 100.357,76.094 100.683,76.094 101.092,76.504 R18.1
Net3_1: 3.1 R19.1 | length 2.5
  Top Layer w0.381: R19.1 71.857,74.7 3.1
NetC3_1: C3.1 D2.1 U1.10 | length 10.9
  Top Layer w0.381: U1.10 88.391,58.185 88.5,58.075 88.5,56.5 89.5,55.5 C3.1 91,55.725 91,57 91.5,57.5 v1(91.5,58.5)
  Bottom Layer w0.381: v1(91.5,58.5) 91.5,58.559 92.007,59.066 D2.1
NetC4_1: C4.1 D1.1 U1.1 | length 11.1
  Top Layer w0.381: U1.1 87.7,70.45 87.708,70.458 87.708,70.958 v1(87.75,71)
  Bottom Layer w0.381: v1(87.75,71) 88.75,72 C4.1 90,72.225 90,73 90.75,73.75 94,73.75 94.261,73.489 94.261,72.717 94.479,72.5 D1.1
NetJ5_6: J5.6 U2.5 | length 23.4
  Top Layer w0.381: J5.6 75.546,52.954 80.581,47.919 91.974,47.919 93.15,49.095 U2.5
NetQ1_1: Q1.1 R13.2 | length 4.4
  Top Layer w0.6: R13.2 105.183,67.44 105.311,67.567 105.514,67.567 106.137,68.19 Q1.1
NetQ2_1: Q2.1 R14.1 | length 4.6
  Top Layer w0.6: R14.1 Q2.1@109.157,55.997 ; Q2.1@108.654,56.5 Q2.1@109.157,55.997 ; Q2.1 Q2.1@109.157,55.997
NetQ4_1: Q4.1 R15.2 | length 5.4
  Top Layer w0.6: R15.2 104.325,63.128 104.453,63 106.5,63 107.5,62 109.004,62 Q4.1
NetQ5_1: Q5.1 R16.1 | length 6.4
  Top Layer w0.6: R16.1 104.5,50.351 104.851,50 109,50 Q5.1 Q5.1@108.7,49.5
NetR9_2: R9.2 U1.8 | length 12.1
  Top Layer w0.381: R9.2 85,53.131 85,53.75 85.25,54 v1(86.5,54) ; U1.8 87.756,60.669 89.272,60.669 89.441,60.5 v1(89.5,60.5)
  Bottom Layer w0.381: v1(86.5,54) 89.5,57 v1(89.5,60.5)
NetR10_2: R10.2 U1.9 | length 10.9
  Top Layer w0.381: R10.2 82,54.277 82.223,54.5 84,54.5 86,56.5 86,59 86.346,59.345 87.591,59.345 U1.9
pads on no net: U2.4

## Polygon pours and split planes (outlines as drawn)
GND on Top Layer "NONET_L02_P-001" (solid, pour order 2): 118,52 127.5,52 127.5,47 118,47
GND on Bottom Layer "NONET_L02_P-001" (solid, pour order 0): 67,80 67,47.5 127,47.5 127,80

## Silkscreen, mask and mechanical layers (free items; w line width, h text height)
Mechanical 1:
  the board outline again, w0.254